# Altium PCB LPC55S69_MINI.PCBdoc (part 1 of 2)
Units mil, origin at the board's own origin, x right, y up, seen from the top; angles counter-clockwise.
Board outline 1610.03 x 1685.03 mil, 2 copper layers (Top Layer, Bottom Layer), stack 31.2 mil thick; 66 components, 51 nets, 267 pads, 110 vias.
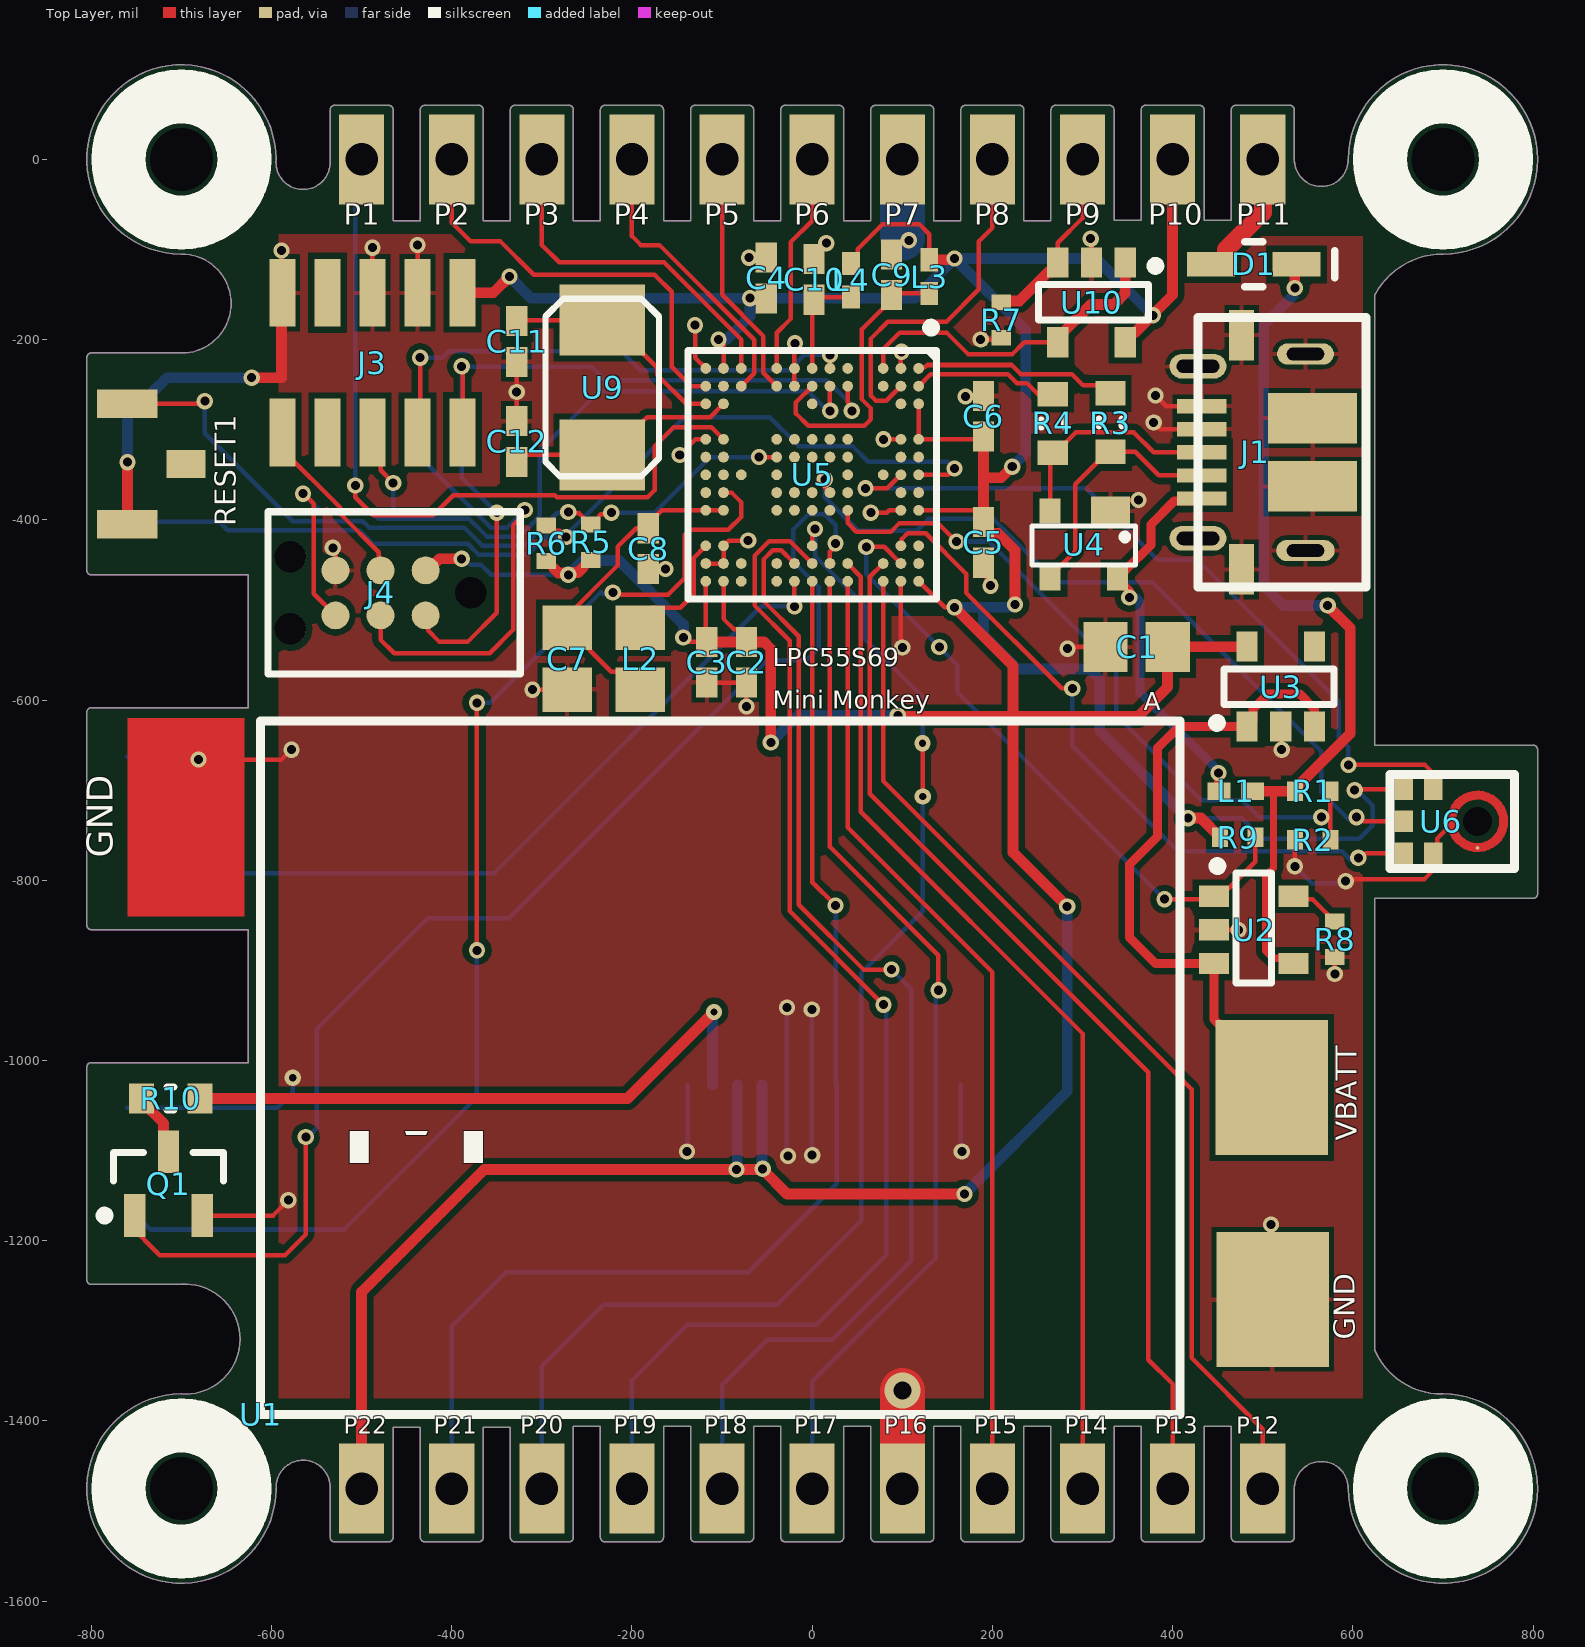
[diagram p0: Top Layer view]
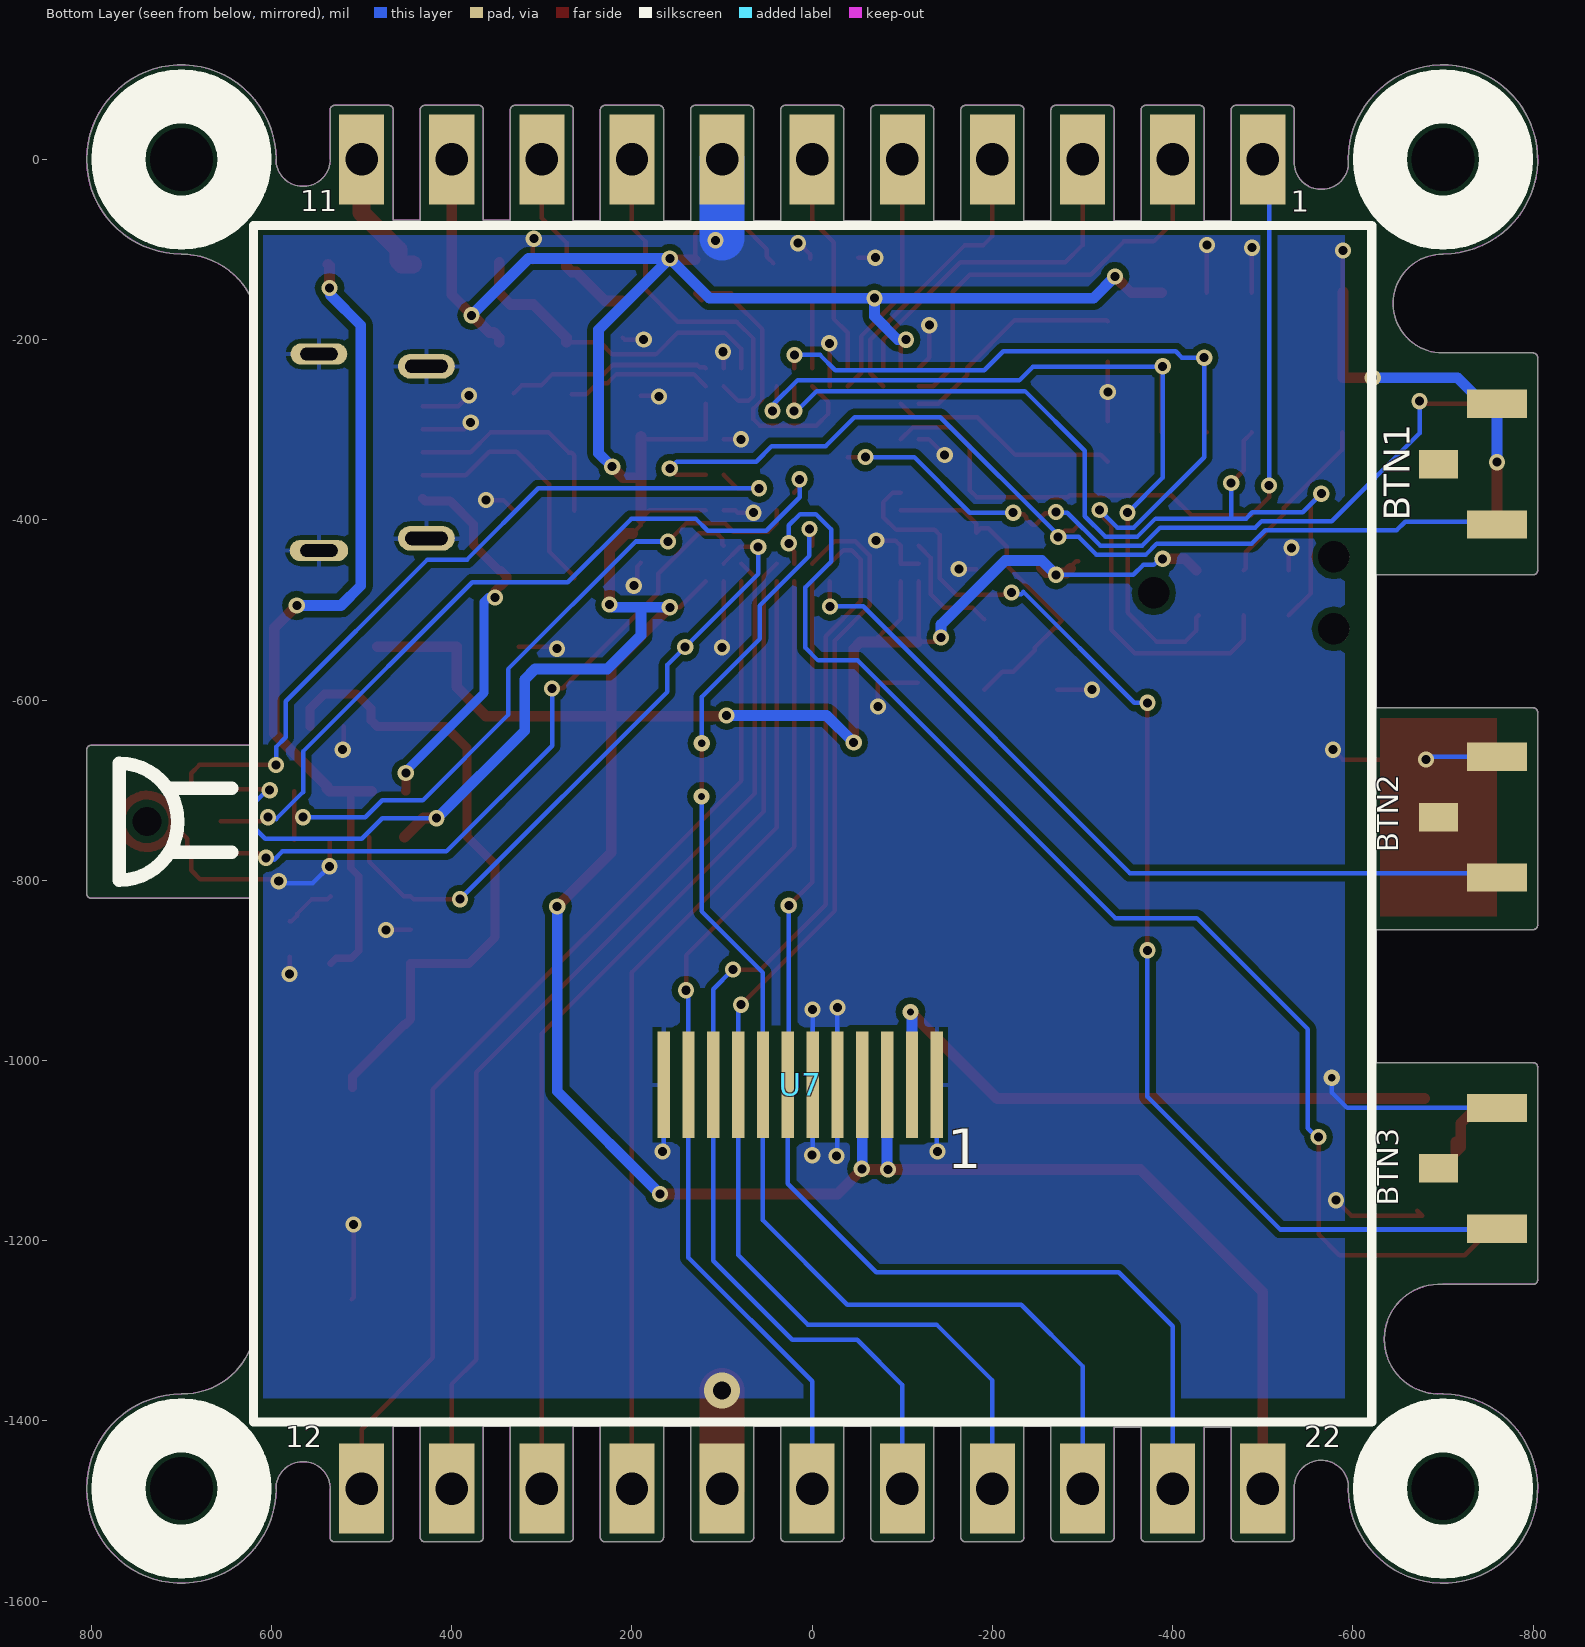
[diagram p1: Bottom Layer view, seen from below]
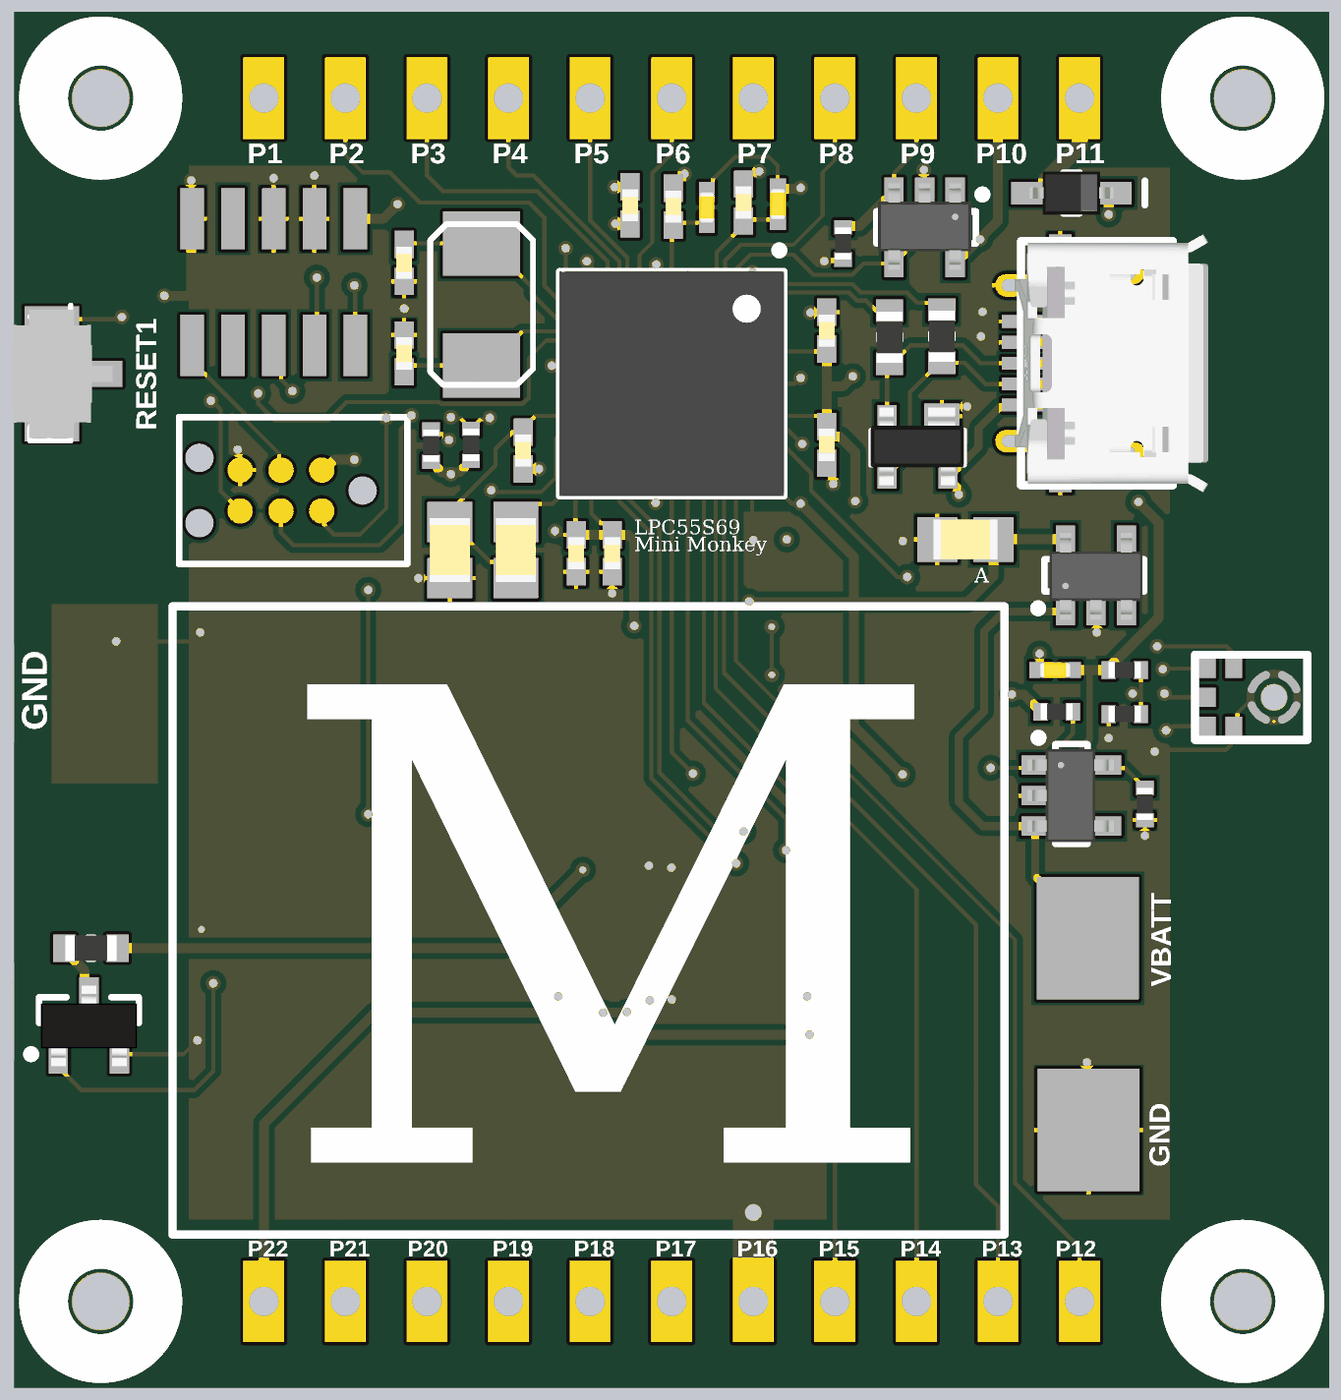
[diagram p2: 3D render of the assembled board from above, using the file's embedded part models]
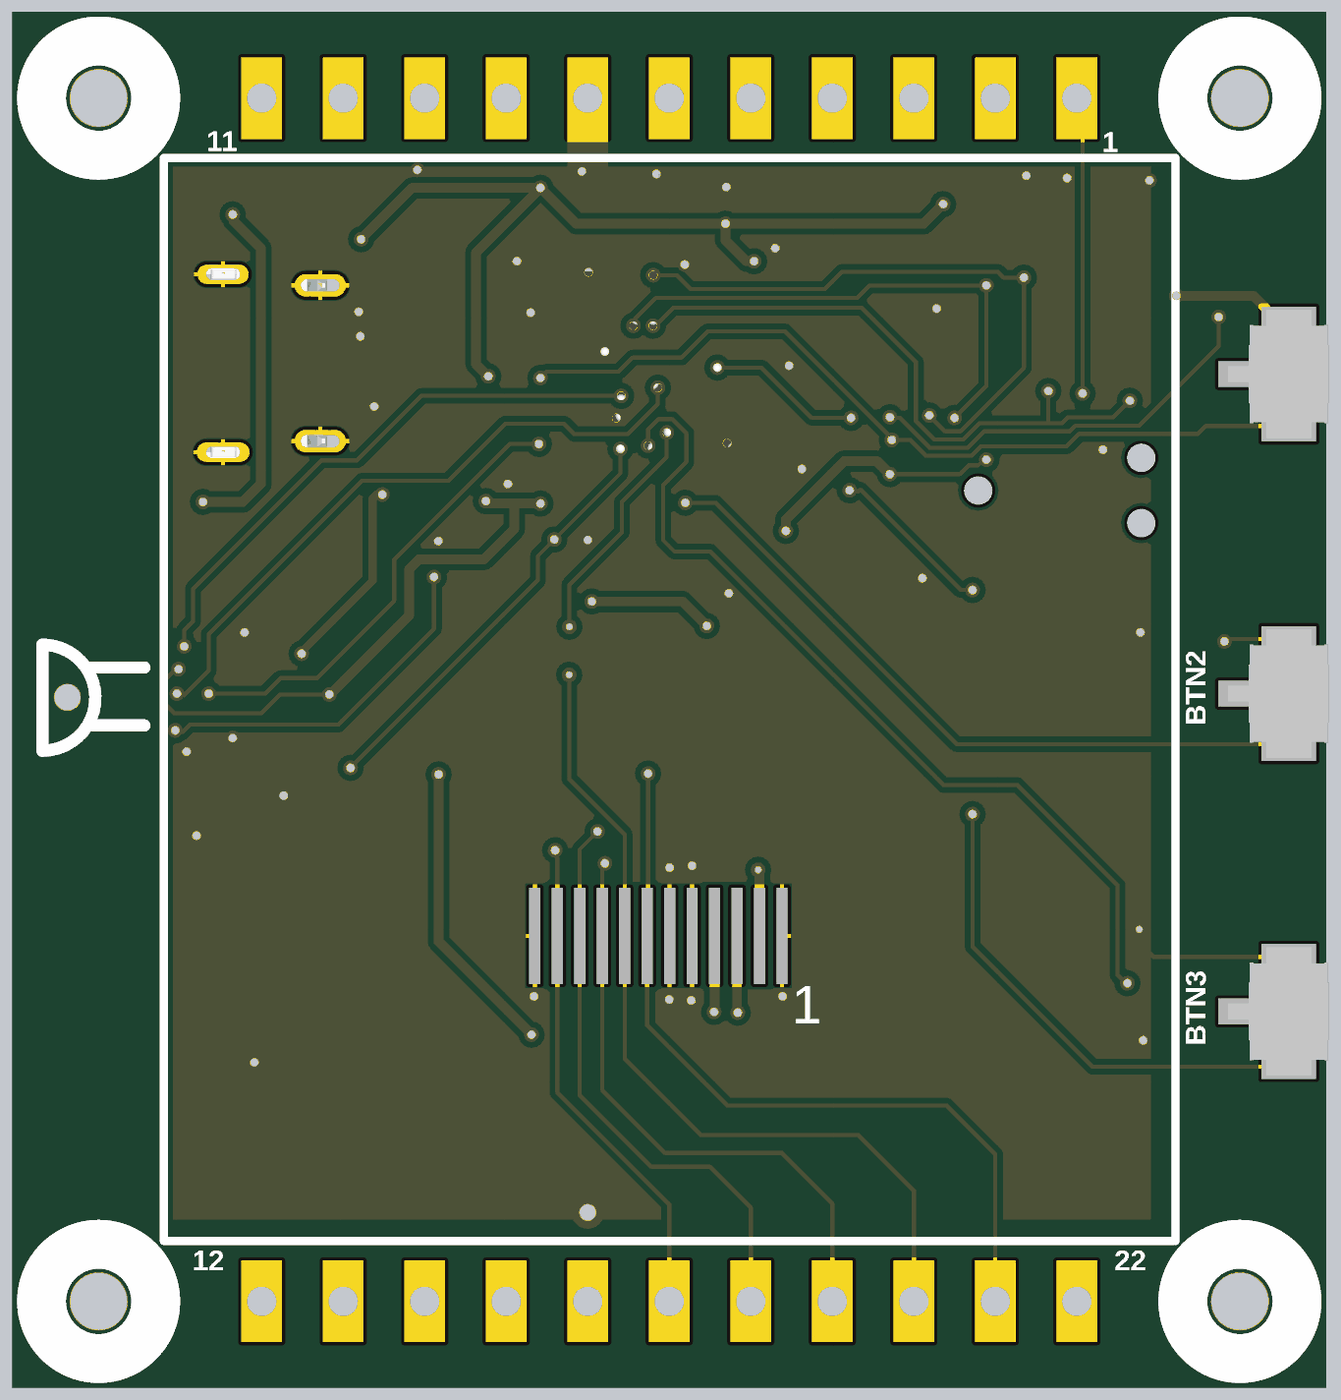
[diagram p3: 3D render of the assembled board from below, using the file's embedded part models]

## Layer stack, top to bottom
Top Solder: solder mask 0.4, Solder Resist, Dk 3.5
Top Layer: signal copper 1.4
Dielectric1: dielectric 28.4, FR-4, Dk 4.8
Bottom Layer: signal copper 1.4
Bottom Solder: solder mask 0.4, Solder Resist, Dk 3.5

## Board outline
-594.98,-1475 ccw(c-600,-1475) -594.99,-1474.8 cw(c-565,-1473.57) -534.99,-1473.57 cw(c-565,-1473.57) -535.01,-1474.8 ccw(c-530,-1475) -535.01,-1475 -535.01,-1529.09 ccw(c-530,-1529.09) -530,-1534.11 -470,-1534.11 ccw(c-470,-1529.09) -464.98,-1529.09 -464.98,-1406.71 -435.01,-1406.71 -435.01,-1529.09 ccw(c-430,-1529.09) -430,-1534.11 -370,-1534.11 ccw(c-370,-1529.09) -364.98,-1529.09 -364.98,-1406.71 -335.01,-1406.71 -335.01,-1529.09 ccw(c-330,-1529.09) -330,-1534.11 -270,-1534.11 ccw(c-270,-1529.09) -264.98,-1529.09 -264.98,-1405.84 -235.01,-1405.84 -235.01,-1529.09 ccw(c-230,-1529.09) -230,-1534.11 -170,-1534.11 ccw(c-170,-1529.09) -164.98,-1529.09 -164.98,-1405.84 -135.01,-1405.84 -135.01,-1529.09 ccw(c-130,-1529.09) -130,-1534.11 -70,-1534.11 ccw(c-70,-1529.09) -64.98,-1529.09 -64.98,-1405.84 -35.01,-1405.84 -35.01,-1529.09 ccw(c-30,-1529.09) -30,-1534.11 30,-1534.11 ccw(c30,-1529.09) 35.02,-1529.09 35.02,-1405.84 64.99,-1405.84 64.99,-1529.09 ccw(c70,-1529.09) 70,-1534.11 130,-1534.11 ccw(c130,-1529.09) 135.02,-1529.09 135.02,-1405.84 164.99,-1405.84 164.99,-1529.09 ccw(c170,-1529.09) 170,-1534.11 230,-1534.11 ccw(c230,-1529.09) 235.02,-1529.09 235.02,-1405.84 264.99,-1405.84 264.99,-1529.09 ccw(c270,-1529.09) 270,-1534.11 330,-1534.11 ccw(c330,-1529.09) 335.02,-1529.09 335.02,-1405.84 364.99,-1405.84 364.99,-1529.09 ccw(c370,-1529.09) 370,-1534.11 430,-1534.11 ccw(c430,-1529.09) 435.02,-1529.09 435.02,-1405.84 464.99,-1405.84 464.99,-1529.09 ccw(c470,-1529.09) 470,-1534.11 530,-1534.11 ccw(c530,-1529.09) 535.02,-1529.09 535.02,-1475 cw(c565,-1475) 594.99,-1475 ccw(c700,-1475) 805.02,-1475 ccw(c700,-1475) 700,-1369.99 ccw(c700,-1375) 699.88,-1369.99 ccw(c698.53,-1289.07) 699.91,-1369.99 699.88,-1369.99 cw(c698.53,-1289.07) 624.23,-1321.15 624.23,-820.01 800,-820.01 ccw(c800,-815) 805.02,-815 805.02,-655 ccw(c800,-655) 800,-649.99 624.23,-649.99 624.23,-150.19 cw(c700.19,-191.46) 699.98,-105.02 cw(c700.19,-191.46) 700.01,-105.01 700,-105.01 ccw(c700,0) 805.02,0 ccw(c700,0) 594.99,0 cw(c565,0) 535.02,0 535.02,55 ccw(c530,55) 530,60.01 470,60.01 ccw(c470,55) 464.99,55 464.99,-67.39 435.02,-67.39 435.02,55 ccw(c430,55) 430,60.01 370,60.01 ccw(c370,55) 364.99,55 364.99,-67.39 335.02,-67.39 335.02,55 ccw(c330,55) 330,60.01 270,60.01 ccw(c270,55) 264.99,55 264.99,-68.25 235.02,-68.25 235.02,55 ccw(c230,55) 230,60.01 170,60.01 ccw(c170,55) 164.99,55 164.99,-68.25 135.02,-68.25 135.02,55 ccw(c130,55) 130,60.01 70,60.01 ccw(c70,55) 64.99,55 64.99,-68.25 35.02,-68.25 35.02,55 ccw(c30,55) 30,60.01 -30,60.01 ccw(c-30,55) -35.01,55 -35.01,-68.25 -64.98,-68.25 -64.98,55 ccw(c-70,55) -70,60.01 -130,60.01 ccw(c-130,55) -135.01,55 -135.01,-68.25 -164.98,-68.25 -164.98,55 ccw(c-170,55) -170,60.01 -230,60.01 ccw(c-230,55) -235.01,55 -235.01,-68.25 -264.98,-68.25 -264.98,55 ccw(c-270,55) -270,60.01 -330,60.01 ccw(c-330,55) -335.01,55 -335.01,-68.25 -364.98,-68.25 -364.98,55 ccw(c-370,55) -370,60.01 -430,60.01 ccw(c-430,55) -435.01,55 -435.01,-68.25 -464.98,-68.25 -464.98,55 ccw(c-470,55) -470,60.01 -530,60.01 ccw(c-530,55) -535.01,55 -535.01,0 ccw(c-530,0) -534.99,-0.49 cw(c-565,-3.21) -534.87,-3.21 cw(c-565,-3.21) -595.01,-0.49 cw(c-565,-3.21) -595.01,-0.46 -595.01,-0.49 ccw(c-600,0) -594.98,0 ccw(c-700,0) -700,-105.01 ccw(c-700,-100) -699.97,-105.01 cw(c-699.69,-159.9) -644.8,-159.9 cw(c-699.69,-159.9) -699.97,-214.79 ccw(c-700,-219.8) -700,-214.79 -800,-214.79 ccw(c-800,-219.8) -805.01,-219.8 -805.01,-456.02 ccw(c-800,-456.02) -800,-461.04 -625.96,-461.04 -625.96,-608.49 -800,-608.49 ccw(c-800,-613.5) -805.01,-613.5 -805.01,-849.72 ccw(c-800,-849.72) -800,-854.74 -625.96,-854.74 -625.96,-1002.19 -800,-1002.19 ccw(c-800,-1007.2) -805.01,-1007.2 -805.01,-1243.43 ccw(c-800,-1243.43) -800,-1248.44 -700,-1248.44 ccw(c-700,-1243.43) -699.68,-1248.43 cw(c-695.79,-1309.21) -634.88,-1309.21 cw(c-695.79,-1309.21) -699.65,-1370 cw(c-695.79,-1309.21) -699.68,-1370 -699.65,-1370 ccw(c-700,-1375) -700,-1369.99 ccw(c-700,-1475)

## Design rules (kind name [scope] priority, off if disabled: settings)
Clearance [All] p1: gap=5 ignorepadtopadclearanceinfootprint=FALSE except(7: Arc-Poly Track-Poly SMDPad-Poly THPad-Poly Via-Poly Fill-Poly Poly-Poly)
PolygonConnect PolygonConnect_1 [IsVia vs InNet('GND')] p1: connectstyle=Direct reliefconductorwidth=10 reliefentries=4 polygonreliefangle="90 Angle" airgapwidth=10
PolygonConnect [All] p2: connectstyle=Relief reliefconductorwidth=5 reliefentries=4 polygonreliefangle="90 Angle" airgapwidth=5
RoutingVias [All] p1: holewidth=12 width=26 viastyle="Through Hole" minholewidth=8 minwidth=18 maxholewidth=50 maxwidth=75
SilkToSolderMaskClearance SilkscreenOverComponentPads [IsPad] p1: minsilkscreentomaskgap=10 clearancetoexposedcopper=TRUE
SolderMaskExpansion [All] p1: expansion=4
Width [All] p1: maxlimit=200 minlimit=5 preferedwidth=5
29 further rules are at their usual default settings.

## Components (designator, comment, footprint, x,y, rotation, side; value= is the part's Value field where it differs from the comment)
BTN1 "B3U-1100P" OMRON_B3U-1100P -760,-338.26 r270 bottom
BTN2 "B3U-1100P" OMRON_B3U-1100P -760,-730 r270 bottom
BTN3 "B3U-1100P" OMRON_B3U-1100P -760,-1119.56 r270 bottom
C1 "10µF" C0805_1.45MM_MD 360,-541 r0 top
C2 "0.1µF" C0402_0.55MM_MD -73,-558 r90 top
C3 "47pF" C0402_0.55MM_MD -117,-558 r90 top
C4 "0.1µF" C0402_0.55MM_MD -51,-131.5 r270 top
C5 "0.1µF" C0402_0.55MM_MD 190,-425 r90 top
C6 "0.1µF" C0402_0.55MM_MD 190,-285 r270 top
C7 "10µF" C0805_1.45MM_MD -272,-554 r90 top
C8 "0.1µF" C0402_0.55MM_MD -182,-432 r90 top
C9 "0.1µF" C0402_0.55MM_MD 88,-128 r90 top
C10 "0.1µF" C0402_0.55MM_MD 2,-133 r270 top
C11 "18pF" C0402_0.55MM_MD -328,-202 r90 top
C12 "18pF" C0402_0.55MM_MD -328,-313 r270 top
D1 "BAT760-7" D_SOD-323_P 490,-116.36 r0 top
J1 "USB Micro B" 10103594-0001LF 491.69,-325 r180 top
J3 "FTSH-105-01-F-DV" "FTSH-105-04-F-DV - HD - NO_STEP" -488,-225 r180 top
J4 "TC2030‐CTL‐NL" "TC2030 NO LATCH" -479,-481 r180 top value=TC2030-CTL-NL
L1 "BKP1005EM221-T" C0402_HD 470,-701.13 r0 top
L2 "CBC2012T4R7M" C0805_1.45MM_MD -191,-554 r90 top
L3 "BKP1005EM221-T" C0402_HD 130,-130 r270 top
L4 "BKP1005EM221-T" C0402_HD 43,-134 r270 top
P1 "" CASTELLATED -500,0 r0 top
P2 "" CASTELLATED -400,0 r180 top
P3 "" CASTELLATED -300,0 r180 top
P4 "" CASTELLATED -200,0 r180 top
P5 "" CASTELLATED -100,0 r180 top
P6 "" CASTELLATED 0,0 r180 top
P7 "" CASTELLATED 100,0 r180 top
P8 "" CASTELLATED 200,0 r180 top
P9 "" CASTELLATED 300,0 r180 top
P10 "" CASTELLATED 400,0 r180 top
P11 "" CASTELLATED 500,0 r180 top
P12 "" CASTELLATED 500,-1475 r180 top
P13 "" CASTELLATED 400,-1475 r0 top
P14 "" CASTELLATED 300,-1475 r0 top
P15 "" CASTELLATED 200,-1475 r0 top
P16 "" CASTELLATED 100,-1475 r0 top
P17 "" CASTELLATED 0,-1475 r0 top
P18 "" CASTELLATED -100,-1475 r0 top
P19 "" CASTELLATED -200,-1475 r0 top
P20 "" CASTELLATED -300,-1475 r0 top
P21 "" CASTELLATED -400,-1475 r0 top
P22 "" CASTELLATED -500,-1475 r0 top
Q1 "FDV303N" SOT-23 -714.4,-1136.57 r90 top
R1 "10k" R0402_0.40MM_MD 555.27,-701.13 r0 top
R2 "19.1k" R0402_0.40MM_MD 555.27,-755 r0 top
R3 "33" R0603_0.55MM_MD 331,-292 r90 top
R4 "33" R0603_0.55MM_MD 267,-293 r90 top
R5 "10k" R0402_0.40MM_MD -246,-425 r270 top
R6 "10k" R0402_0.40MM_MD -295,-426 r270 top
R7 "10k" R0402_0.40MM_MD 210,-178.2 r90 top
R8 "10k" R0402_0.40MM_MD 580,-865.32 r90 top
R9 "10k" R0402_0.40MM_MD 472,-752 r0 top
R10 "10" R0603_0.55MM_MD -712,-1042 r0 top
RESET1 "B3U-1100P" OMRON_B3U-1100P -760,-338 r90 top
U1 "1317" LIPO-150MAH -612,-1393 r0 top
U2 "MCP73832T-2ATI/OT" SOT23-5 490,-855 r0 top
U3 "MCP1802T-3302I/OT" SOT23-5 520,-585 r90 top
U4 "PRTR5V0U2X,215" SOT143B 331,-390 r180 top
U5 "LPC55S69JEV98K" 98-VFBGA 0,-350 r270 top
U6 "SPH0645LM4H-B" SPH0645LM4H-B 738.29,-734.57 r90 top
U7 "ER-TFT1.54-1" ER-TFT1.54-1 13.31,-1026.89 r180 bottom locked
U9 "16MHz" ABM3 -233,-253 r90 top
U10 "IC SINGLE SUPPLY OPAMP SOT-23-5" SOT95P245X145-5L 310,-158.51 r270 top value=OPA340NA

## Footprints (in the part's own frame and the unit in brackets; to place one, negate y for a bottom-side part, rotate by r counter-clockwise, add the part's x,y. Pads: shape width x height; smd on the part's side, far side on the other; paste and mask are expansions set on the pad)
98-VFBGA [mil] "BGA, 98-Leads, Body 7.00x7.00mmx0.97mm, Pitch 0.50mm"
  round 12 smd paste+0 mask+1: A1(-118.11,118.11) A2(-98.43,118.11) A3(-78.74,118.11) A5(-39.37,118.11) A6(-19.68,118.11) A7(0,118.11) A8(19.69,118.11) A9(39.37,118.11) A11(78.74,118.11) A12(98.43,118.11) A13(118.11,118.11) B1(-118.11,98.43) B2(-98.43,98.43) B3(-78.74,98.43) B5(-39.37,98.43) B6(-19.68,98.43) B7(0,98.43) B8(19.69,98.43) B9(39.37,98.43) B11(78.74,98.43) B12(98.43,98.43) B13(118.11,98.43) C1(-118.11,78.74) C2(-98.43,78.74) C7(0,78.74) C12(98.43,78.74) C13(118.11,78.74) E1(-118.11,39.37) E2(-98.43,39.37) E5(-39.37,39.37) E6(-19.68,39.37) E7(0,39.37) E8(19.69,39.37) E9(39.37,39.37) E12(98.43,39.37) E13(118.11,39.37) F1(-118.11,19.69) F2(-98.43,19.69) F5(-39.37,19.69) F6(-19.68,19.69) F8(19.69,19.69) F9(39.37,19.69) F12(98.43,19.69) F13(118.11,19.69) G1(-118.11,0) G2(-98.43,0) G3(-78.74,0) G5(-39.37,0) G6(-19.68,0) G8(19.69,0) G9(39.37,0) G11(78.74,0) G12(98.43,0) G13(118.11,0) H1(-118.11,-19.69) H2(-98.43,-19.69) H5(-39.37,-19.69) H6(-19.68,-19.69) H8(19.69,-19.69) H9(39.37,-19.69) H12(98.43,-19.69) H13(118.11,-19.69) J1(-118.11,-39.37) J2(-98.43,-39.37) J5(-39.37,-39.37) J6(-19.68,-39.37) J7(0,-39.37) J8(19.69,-39.37) J9(39.37,-39.37) J12(98.43,-39.37) J13(118.11,-39.37) L1(-118.11,-78.74) L2(-98.43,-78.74) L7(0,-78.74) L12(98.43,-78.74) L13(118.11,-78.74) M1(-118.11,-98.43) M2(-98.43,-98.43) M3(-78.74,-98.43) M5(-39.37,-98.43) M6(-19.68,-98.43) M7(0,-98.43) M8(19.69,-98.43) M9(39.37,-98.43) M11(78.74,-98.43) M12(98.43,-98.43) M13(118.11,-98.43) N1(-118.11,-118.11) N2(-98.43,-118.11) N3(-78.74,-118.11) N5(-39.37,-118.11) N6(-19.68,-118.11) N7(0,-118.11) N8(19.69,-118.11) N9(39.37,-118.11) N11(78.74,-118.11) N12(98.43,-118.11) N13(118.11,-118.11)
  silkscreen extent -168,-138 138,138, body extent -138,-138 138,138, height 38
10103594-0001LF [mm] "USB uB"
  rect 1.4x0.4 smd: 1(1.506,1.3) 2(1.506,0.65) 3(1.506,0) 4(1.506,-0.65) 5(1.506,-1.3)
  rect 2.5x1.425 smd: MOUNT(-1.615,0.962) MOUNT(-1.615,-0.962)
  oval 1.65x0.6 hole 0.36 slot 1.05 at 0 deg: MOUNT(-1.415,2.77)
  oval 1.6x0.6 hole 0.36 slot 1.05 at 0 deg: MOUNT(-1.415,-2.77)
  rect 0.7x1.425 smd: MOUNT(0.385,3.3) MOUNT(0.385,-3.3)
  oval 1.6x0.7 hole 0.38 slot 1.2 at 0 deg: MOUNT(1.615,2.425) MOUNT(1.615,-2.425)
  silkscreen extent -3.11,-3.8 1.62,3.8, body extent -4.21,-4.02 1.82,4.02, height 2.89
ABM3 [mm] "Abracon Crystal 5x3.2mm"
  rect 2x2.4 smd: 1(-1.9,0) 2(1.9,0)
  silkscreen extent -2.5,-1.6 2.5,1.6, body extent -2.5,-1.6 2.5,1.6, height 1.3
C0402_0.55MM_MD [mm] "Capacitor - 0402 - Medium Density"
  rect 0.85x0.6 smd: 1(-0.575,0) 2(0.575,0)
  body extent -0.5,-0.25 0.5,0.25, height 0.55
C0402_HD [mm] "Capacitor 0402 - High Density"
  rect 0.65x0.5 smd: 1(-0.475,0) 2(0.475,0)
  body extent -0.5,-0.25 0.5,0.25, height 0.55
C0805_1.45MM_MD [mm] "Capacitor - 0805 - Medium Density"
  rect 1.25x1.4 smd: 1(-0.875,0) 2(0.875,0)
  body extent -1,-0.62 1,0.63, height 1.45
CASTELLATED [mil]
  rect 50x100 hole 36: 1(0,0)
D_SOD-323_P [mm] "SOD-123 Diode - Polarized"
  rect 1.35x0.7 smd: 1(-1.2,0) 2(1.2,0)
  silkscreen extent -0.25,-0.64 2.29,0.64, body extent -1.3,-0.68 1.3,0.67, height 1.1
ER-TFT1.54-1 [mm]
  rect 0.35x3 smd: 1(3.85,0) 2(3.15,0) 3(2.45,0) 4(1.75,0) 5(1.05,0) 6(0.35,0) 7(-0.35,0) 8(-1.05,0) 9(-1.75,0) 10(-2.45,0) 11(-3.15,0) 12(-3.85,0)
  silkscreen extent -15.41,-9.5 16.11,24.22, body extent -15.54,-9.63 16.24,24.35, height 2.1
"FTSH-105-04-F-DV - HD - NO_STEP" [mil] "Connector for Cortex Serial Wire Debug"
  rect 29x75 smd: 1(-100,-77) 2(-100,78) 3(-50,-77) 4(-50,78) 5(0,-77) 6(0,78) 7(50,-77) 8(50,78) 9(100,-77) 10(100,78)
LIPO-150MAH [mil]
  silkscreen extent 0,0 1020,770, body extent 0,0 1020,770, height 140
OMRON_B3U-1100P [mm] "Omron Ultra-small tactile switch B3U 3.0 x 2.5 x 1.2mm"
  rect 0.8x1.7 smd: 1(-1.7,0) 2(1.7,0)
  rect 0.8x1.1 smd: S(0,-1.65)
  body extent -2,-1.9 2,1.25, height 1.61
R0402_0.40MM_MD [mm] "Resistor 0402 Medium Density"
  rect 0.45x0.55 smd: 1(-0.5,0) 2(0.5,0)
  body extent -0.5,-0.25 0.5,0.25, height 0.4
R0603_0.55MM_MD [mm] "Resistor 0603 Medium Density"
  rect 0.7x0.85 smd: 1(-0.825,0) 2(0.825,0)
  silkscreen extent -0.1,-0.33 0.1,0.33, body extent -0.8,-0.4 0.8,0.4, height 0.55
SOT23-5 [mm] "SOT23, 5-Leads, Body 3.1x2.6mm (max), Pitch 0.95mm, IPC High Density"
  rect 0.85x0.6 smd: 1(-1.125,0.95) 2(-1.125,0) 3(-1.125,-0.95) 4(1.125,-0.95) 5(1.125,0.95)
  silkscreen extent -1.15,-1.5 0.5,1.92, body extent -1.38,-1.45 1.32,1.45, height 1.15
SOT95P245X145-5L [mm] "SOT23, 5-Leads, Body 3.1x2.6mm (max), Pitch 0.95mm, IPC High Density"
  rect 0.85x0.6 smd: 1(-1.125,0.95) 2(-1.125,0) 3(-1.125,-0.95) 4(1.125,-0.95) 5(1.125,0.95)
  silkscreen extent -1.15,-1.5 0.5,1.93, body extent -1.38,-1.45 1.32,1.45, height 1.15
SOT143B [mm] "SOT143B"
  rect 1.1x0.8 smd: 1(0,0)
  rect 0.6x0.7 smd: 2(1.702,0) 3(1.702,1.9) 4(-0.2,1.9)
  silkscreen extent -0.71,0.43 2.21,1.52, body extent -0.7,-0.27 2.22,2.15, height 1
SOT-23 [mm] "SOT-23"
  rect 1.2x0.6 smd: 1(-0.9,0.95) 2(-0.9,-0.95) 3(0.9,0)
  silkscreen extent -1.02,-1.55 0.87,1.92, body extent -1.27,-1.5 1.23,1.5, height 1.07
SPH0645LM4H-B [mm]
  rect 0.6x0.522 smd: 1(-0.9,2.074) 2(-0.9,1.252) 4(0.9,1.252) 5(0.9,2.074) 6(0,2.074)
  round 0.1 smd paste-100 mask+0: 3(-0.75,0)
  round 0 hole 0.813 paste-25.4: PORT_HOLE(0,0)
  Top Layer lines w0.254: -0.083,0.734 cw(c0,0) 0,-0.738 cw(c0,0) -0.083,0.734
  silkscreen extent -1.33,-1.04 1.33,2.46, body extent -1.33,-1.02 1.33,2.45, height 1
"TC2030 NO LATCH" [mil] "TC2030  NO LATCH"
  round 31 smd paste-40: 1(-50,-25) 2(-50,25) 3(0,-25) 4(0,25) 5(50,-25) 6(50,25)
  round 34 hole 35 unplated: A(-100,0) B(100,40) C(100,-40)
  silkscreen extent -155,-90 125,90

## Part data
BTN1 BTN2 BTN3 RESET1: "SWITCH TACTILE SPST-NO 0.05A 12V", Contact Rating @ Voltage="0.05A @ 12VDC", Illumination Type, Color=-, Manufacturer="Omron Electronics Inc-EMC Div", Operating Force=153gf, Operating Temperature="-25°C ~ 70°C", Supplier Part Number 1=SW1021CT-ND, Actuator Height off PCB, from Pins=1.60mm, Actuator Material=-, Actuator Orientation="Top Actuated", Actuator Type=Standard, Category=Switches, CategorySort=700, Circuit=SPST-NO, ComponentLink1Description=http://www.components.omron.com/components/web/PDFLIB.nsf/0/2DD3893C7DD33E9E862572900079E9D6/$file/B3U_1110.pdf, ComponentLink1URL=http://www.components.omron.com/components/web/PDFLIB.nsf/0/2DD3893C7DD33E9E862572900079E9D6/$file/B3U_1110.pdf, Features="Grounding Pin", Illumination=Non-Illuminated, Illumination Voltage (Nominal)=-, Ingress Protection="Dust Proof", Manufacturer Part Number=B3U-1100P, Mechanical Life="200,000 Cycles", Mounting Type="Surface Mount", Outline="3.00mm x 2.50mm", Packaging="Cut Tape (CT)", Pricing 1="1=1.25, 10=1.201, 25=1.1332, 50=0.997, 100=0.9064, 250=0.86108, 500=0.83842, 1000=0.65714 (USD)", RoHS="RoHS Compliant", Stock 1=45170, Supplier 1=Digi-Key, Switch Function=Off-Mom, Switch Travel=0.15mm, Termination Style="SMD (SMT) Tab"
C1 C7: library part CGA4J1X7R0J106K125AC, "CAP CER 10UF 6.3V X7R 0805", Manufacturer="TDK Corporation", Operating Temperature="-55°C ~ 125°C", Package=0805, Ratings=AEC-Q200, Supplier Part Number 1=445-6971-1-ND, Temperature Coefficient=X7R, Tolerance=±10%, Voltage - Rated=6.3V, Category=Capacitors, ComponentLink1Description="Datasheet (Internal)", ComponentLink1URL=datasheets\TDK\mlcc_automotive_general_en.pdf, ComponentLink2Description="Datasheet (External)", ComponentLink2URL=https://product.tdk.com/info/en/catalog/datasheets/mlcc_automotive_general_en.pdf, Features=-, Manufacturer Part Number=CGA4J1X7R0J106K125AC, Substitution Notes="10µF , 6.3V , ±10% , X7R , -55°C ~ 125°C , AEC-Q200 , 0805", Supplier 1=Digikey, Thickness (Max)=1.45MM
C2 C4 C5 C6 C8 C9 C10: library part CGA2B1X7R1C104K050BC, "CAP CER 0.1UF 16V X7R 0402", Manufacturer="TDK Corporation", Operating Temperature="-55°C ~ 125°C", Package=0402, Ratings=AEC-Q200, Supplier Part Number 1=445-5613-1-ND, Temperature Coefficient=X7R, Tolerance=±10%, Voltage - Rated=16V, Category=Capacitors, ComponentLink1Description="Datasheet (Internal)", ComponentLink1URL=datasheets\TDK\mlcc_automotive_general_en.pdf, ComponentLink2Description="Datasheet (External)", ComponentLink2URL=https://product.tdk.com/info/en/catalog/datasheets/mlcc_automotive_general_en.pdf, Features=-, Manufacturer Part Number=CGA2B1X7R1C104K050BC, Substitution Notes="0.1µF , 16V , ±10% , X7R , -55°C ~ 125°C , AEC-Q200 , 0402", Supplier 1=Digikey, Thickness (Max)=0.55MM
C3: library part CGA2B2C0G1H470J050BA, "CAP CER 47PF 50V C0G 0402", Manufacturer="TDK Corporation", Operating Temperature="-55°C ~ 125°C", Package=0402, Ratings=AEC-Q200, Supplier Part Number 1=445-5592-1-ND, Temperature Coefficient="C0G, NP0", Tolerance=±5%, Voltage - Rated=50V, Category=Capacitors, ComponentLink1Description="Datasheet (Internal)", ComponentLink1URL=datasheets\TDK\mlcc_automotive_general_en.pdf, ComponentLink2Description="Datasheet (External)", ComponentLink2URL=https://product.tdk.com/info/en/catalog/datasheets/mlcc_automotive_general_en.pdf, Features=-, Manufacturer Part Number=CGA2B2C0G1H470J050BA, Substitution Notes="47pF , 50V , ±5% , C0G, NP0 , -55°C ~ 125°C , AEC-Q200 , 0402", Supplier 1=Digikey, Thickness (Max)=0.55MM
C11 C12: library part CGA2B2C0G1H180J050BA, "CAP CER 18PF 50V C0G 0402", Manufacturer="TDK Corporation", Operating Temperature="-55°C ~ 125°C", Package=0402, Ratings=AEC-Q200, Supplier Part Number 1=445-5587-1-ND, Temperature Coefficient="C0G, NP0", Tolerance=±5%, Voltage - Rated=50V, Category=Capacitors, ComponentLink1Description="Datasheet (Internal)", ComponentLink1URL=datasheets\TDK\mlcc_automotive_general_en.pdf, ComponentLink2Description="Datasheet (External)", ComponentLink2URL=https://product.tdk.com/info/en/catalog/datasheets/mlcc_automotive_general_en.pdf, Features=-, Manufacturer Part Number=CGA2B2C0G1H180J050BA, Substitution Notes="18pF , 50V , ±5% , C0G, NP0 , -55°C ~ 125°C , AEC-Q200 , 0402", Supplier 1=Digikey, Thickness (Max)=0.55MM
D1: "DIODE SCHOTTKY 30V 1A SOD323", Capacitance @ Vr- F="25pF @ 5V- 1MHz", Current - Average Rectified (Io)=1A, Current - Reverse Leakage @ Vr="50µA @ 15V", Manufacturer="Diodes Inc", Package="SC-76- SOD-323", Supplier Device Package=SOD-323, Supplier Part Number 1=BAT760DICT-ND, Voltage - DC Reverse (Vr) (Max)=30V, Voltage - Forward (Vf) (Max) @ If="550mV @ 1A", Category=Diodes, CategorySort=400, ComponentLink1Description="Internal Datasheet", ComponentLink1URL=http://www.diodes.com/datasheets/ds30498.pdf, ComponentLink2Description="External Datasheet", ComponentLink2URL=http://www.diodes.com/datasheets/ds30498.pdf, Diode Suffix=1A_2C, Diode Type=Schottky, Manufacturer Part Number=BAT760-7, Mounting Type="Surface Mount", Num Pins=2, Packaging="Cut Tape (CT)", Reverse Recovery Time (trr)=-, SortValue=BAT760-7, Speed="Fast Recovery =< 500ns- > 200mA (Io)", Supplier 1=Digi-Key
J1: library part 10103594-0001LF, "CONN RCPT STD MICRO USB TYPE B", Manufacturer=FCI, Supplier Part Number 1=609-4050-1-ND, Category="Connectors, Interconnects", ComponentLink1Description=http://portal.fciconnect.com/res/en/pdffiles/doc_search/10103594.pdf, ComponentLink1URL=http://portal.fciconnect.com/res/en/pdffiles/doc_search/10103594.pdf, Connector Type="USB - micro B", Features="Shielded, Solder Retention", Gender=Receptacle, Ingress Protection=-, Manufacturer Part Number=10103594-0001LF, Micro USB B=Value, Mounting Type="Surface Mount, Right Angle, Horizontal", Notes="Similar to", Number of Contacts=5, Packaging="Cut Tape (CT)", Pricing 1="1=1.1, 10=0.768, 100=0.517, 250=0.43912, 500=0.41716 (USD)", RoHS="RoHS Compliant", Specifications="USB 2.0", Stock 1=23288, Supplier 1=Digi-Key
J3: library part CORTEX-DEBUG, "SAMTEC - FTSH-105-01-F-DV - .050 X .050", Manufacturer=SAMTEC, Supplier Part Number 1=01R3399, Category=Connectors, Manufacturer Part Number=FTSH-105-01-F-DV, Pricing 1="1=0.974, 25000=0.835, 50000=0.774 (USD)", Stock 1=0, Supplier 1=Newark
J4: library part TC2030-CTL-NL, "Tag Connect Pads - No latching Clips - ARM"
L1 L3 L4: "FERRITE BEAD 220 OHM 0402 1LN", Current Rating (Max)=1A, DC Resistance (DCR) (Max)="150 mOhm", Impedance @ Frequency="220 Ohm @ 100MHz", Manufacturer="Taiyo Yuden", Operating Temperature="-55°C ~ 85°C", Package / Case="0402 (1005 Metric)", Ratings=-, Supplier Part Number 1=587-3290-2-ND, Category=Filters, ComponentLink1Description=http://ds.yuden.co.jp/TYCOMPAS/ut/detail.do?productNo=BKP1005EM221-T&fileName=BKP1005EM221-T_SS&mode=specSheetDownload, ComponentLink1URL=http://ds.yuden.co.jp/TYCOMPAS/ut/detail.do?productNo=BKP1005EM221-T&fileName=BKP1005EM221-T_SS&mode=specSheetDownload, Filter Type="Power Line", Height (Max)="0.022\" (0.55mm)", Manufacturer Part Number=BKP1005EM221-T, Mounting Type="Surface Mount", Number of Lines=1, Packaging="Tape & Reel (TR)", Pricing 1="10000=0.0145, 20000=0.014, 30000=0.013, 50000=0.01285 (USD)", RoHS="RoHS Compliant", Size / Dimension="0.039\" L x 0.022\" W (1.00mm x 0.55mm)", Stock 1=60000, Supplier 1=Digi-Key
L2: "FIXED IND 4.7UH 520MA 650 MOHM", Case/Package=0805, Case Code (Metric)=2012, Current Rating=520mA, DC Resistance (DCR)=650mR, Inductance=4.7uH, Inductance Tolerance=20%, Manufacturer="Taiyo Yuden", Max Operating Temperature=105°C, Min Operating Temperature=-40°C, Package Quantity=3000, Saturation Current=360mA, Self Resonant Frequency=45MHz, Supplier Part Number 1=587-1602-1-ND, Test Frequency=7.96MHz, Case Code (Imperial)=0805, ComponentLink1Description=https://datasheet.ciiva.com/15981/214cbc2012t4r7m-15981637.pdf?src-supplier=Onlinecomponents.com, ComponentLink1URL=https://datasheet.ciiva.com/15981/214cbc2012t4r7m-15981637.pdf?src-supplier=Onlinecomponents.com, ComponentLink2Description=https://datasheet.ciiva.com/1040/cbc2012t4r7m-ss-1040456.pdf?src-supplier=Digi-Key, ComponentLink2URL=https://datasheet.ciiva.com/1040/cbc2012t4r7m-ss-1040456.pdf?src-supplier=Digi-Key, ComponentLink3Description=https://datasheet.ciiva.com/8505/cbc2012t4r7m-ss-8505656.pdf?src-supplier=Avnet, ComponentLink3URL=https://datasheet.ciiva.com/8505/cbc2012t4r7m-ss-8505656.pdf?src-supplier=Avnet, ComponentLink4Description=https://datasheet.ciiva.com/8001/wound02-e-8001849.pdf?src-supplier=Element14, ComponentLink4URL=https://datasheet.ciiva.com/8001/wound02-e-8001849.pdf?src-supplier=Element14, Composition=Wirewound, Core Material=Ferrite, Halogen Free="Halogen Free", Height=1.25mm, Height - Seated (Max)=0.057inch, Lead Free=Exempt, Length=0.079inch, Manufacturer Part Number=CBC2012T4R7M, Max DC Current=520mA, Mount="Surface Mount", Number of Pins=2, Packaging="Tape and Reel", Pricing 1="1=0.24000, 10=0.21600, 100=0.14860, 500=0.12702, 1000=0.09729 (USD)", REACH SVHC="No SVHC", RoHS=Yes, Shielding=Unshielded, Stock 1=7720, Supplier 1=Digi-Key, Termination=SMD/SMT, Tolerance=20%, Width=0.049inch
Q1: "MOSFET N-CH 25V 680MA SOT-23", Current - Continuous Drain (Id) @ 25° C=680mA, Drain to Source Voltage (Vdss)=25V, Input Capacitance (Ciss) @ Vds="50pF @ 10V", Manufacturer="Fairchild Semiconductor", Package / Case="SOT-23-3, TO-236-3, Micro3™, SSD3, SST3", Power - Max=350mW, Source Part Number=FDV303NCT-ND, Supplier Device Package=SOT-23, Category="Discrete Semiconductor Products", ComponentLink1Description=http://www.fairchildsemi.com/ds/FD/FDV303N.pdf, ComponentLink1URL=http://www.fairchildsemi.com/ds/FD/FDV303N.pdf, FET Feature="Logic Level Gate", FET Type="MOSFET N-Channel, Metal Oxide", Gate Charge (Qg) @ Vgs="2.3nC @ 4.5V", Manufacturer Part Number=FDV303N, Mounting Type="Surface Mount", Packaging="Cut Tape (CT)", Pricing 1="1=0.49, 10=0.347, 100=0.231, 250=0.16632, 500=0.13398, 750=0.11551, 1000=0.10395, 2000=0.0924 (USD)", Rds On (Max) @ Id, Vgs="450 mOhm @ 500mA, 4.5V", RoHS="RoHS Compliant", Source=Digikey, Stock 1=0, Supplier 1=Digi-Key, Supplier Part Number 1=FDV303NCT-ND, Vgs(th) (Max) @ Id="1.5V @ 250µA"
R1 R5 R6 R7 R8 R9: library part ERJ-2RKF1002X, "RES 10K OHM 1/10W 1% 0402 SMD", Limiting Element Voltage=50, Manufacturer="Panasonic Electronic Components", Maximum Overload Voltage=100, Maximum Working Voltage=31.6V, Package="0402 (1005 Metric)", Package Power="0402  (0.1W)", Power (Watts)="0.1W- 1/10W", Ratings=AEC-Q200, Sort Value=10000, Sort Value Package=402_10000, Supplier Package=0402, Supplier Part Number 1=P10.0KLCT-ND, Temperature Coefficient=±100ppm/°C, Tolerance=±1%, Category=Resistors, ComponentLink1Description="Internal Datasheet", ComponentLink1URL="datasheets\Panasonic Electronic Components\AOA0000CE2.pdf", ComponentLink2Description="External Datasheet", ComponentLink2URL=http://industrial.panasonic.com/www-data/pdf/AOA0000/AOA0000CE2.pdf, Composition="Thick Film", Features=-, Height=0.40MM, Manufacturer Part Number=ERJ-2RKF1002X, Number of Terminations=2, Packaging="Cut Tape (CT)", Resistance (Ohms)=10k, Size / Dimension="0.039\" L x 0.020\" W (1.00mm x 0.50mm)", Substitution Notes="10k , ±1% , 0402 , AEC-Q200", Supplier 1=Digi-Key
R2: library part ERJ-2RKF1912X, "RES 19.1K OHM 1/10W 1% 0402 SMD", Limiting Element Voltage=50, Manufacturer="Panasonic Electronic Components", Maximum Overload Voltage=100, Maximum Working Voltage=43.7V, Package="0402 (1005 Metric)", Package Power="0402  (0.1W)", Power (Watts)="0.1W- 1/10W", Ratings=AEC-Q200, Sort Value=19100, Sort Value Package=402_19100, Supplier Package=0402, Supplier Part Number 1=P19.1KLCT-ND, Temperature Coefficient=±100ppm/°C, Tolerance=±1%, Category=Resistors, ComponentLink1Description="Internal Datasheet", ComponentLink1URL="datasheets\Panasonic Electronic Components\AOA0000CE2.pdf", ComponentLink2Description="External Datasheet", ComponentLink2URL=http://industrial.panasonic.com/www-data/pdf/AOA0000/AOA0000CE2.pdf, Composition="Thick Film", Features=-, Height=0.40MM, Manufacturer Part Number=ERJ-2RKF1912X, Number of Terminations=2, Packaging="Cut Tape (CT)", Resistance (Ohms)=19.1k, Size / Dimension="0.039\" L x 0.020\" W (1.00mm x 0.50mm)", Substitution Notes="19.1k , ±1% , 0402 , AEC-Q200", Supplier 1=Digi-Key
R3 R4: library part ERJ-3EKF33R0V, "RES 33 OHM 1/10W 1% 0603 SMD", Limiting Element Voltage=75, Manufacturer="Panasonic Electronic Components", Maximum Overload Voltage=150, Maximum Working Voltage=1.8V, Package="0603 (1608 Metric)", Package Power="0603  (0.1W)", Power (Watts)="0.1W- 1/10W", Ratings=AEC-Q200, Sort Value Package=603_33, Supplier Package=0603, Supplier Part Number 1=P33.0HCT-ND, Temperature Coefficient=±100ppm/°C, Tolerance=±1%, Category=Resistors, ComponentLink1Description="Internal Datasheet", ComponentLink1URL="datasheets\Panasonic Electronic Components\AOA0000CE2.pdf", ComponentLink2Description="External Datasheet", ComponentLink2URL=http://industrial.panasonic.com/www-data/pdf/AOA0000/AOA0000CE2.pdf, Composition="Thick Film", Features=-, Height=0.55MM, Manufacturer Part Number=ERJ-3EKF33R0V, Number of Terminations=2, Packaging="Cut Tape (CT)", Resistance (Ohms)=33, Size / Dimension="0.063\" L x 0.031\" W (1.60mm x 0.80mm)", Sort Value=33, Substitution Notes="33 , ±1% , 0603 , AEC-Q200", Supplier 1=Digi-Key
R10: library part ERJ-3EKF10R0V, "RES 10 OHM 1/10W 1% 0603 SMD", Limiting Element Voltage=75, Manufacturer="Panasonic Electronic Components", Maximum Overload Voltage=150, Maximum Working Voltage=1.0V, Package="0603 (1608 Metric)", Package Power="0603  (0.1W)", Power (Watts)="0.1W- 1/10W", Ratings=AEC-Q200, Sort Value Package=603_10, Supplier Package=0603, Supplier Part Number 1=P10.0HCT-ND, Temperature Coefficient=±100ppm/°C, Tolerance=±1%, Category=Resistors, ComponentLink1Description="Internal Datasheet", ComponentLink1URL="datasheets\Panasonic Electronic Components\AOA0000CE2.pdf", ComponentLink2Description="External Datasheet", ComponentLink2URL=http://industrial.panasonic.com/www-data/pdf/AOA0000/AOA0000CE2.pdf, Composition="Thick Film", Features=-, Height=0.55MM, Manufacturer Part Number=ERJ-3EKF10R0V, Number of Terminations=2, Packaging="Cut Tape (CT)", Resistance (Ohms)=10, Size / Dimension="0.063\" L x 0.031\" W (1.60mm x 0.80mm)", Sort Value=10, Substitution Notes="10 , ±1% , 0603 , AEC-Q200", Supplier 1=Digi-Key
U1: "FLORA LI-PO BATTERY 3.7V 150MAH", Manufacturer="Adafruit Industries", Supplier Part Number 1=1528-1839-ND, ComponentLink1Description=http://www.mouser.com/ds/2/737/C1515_-_Li-Polymer_402025_150mAh_3.7V_with_PCM-932829.pdf?src-supplier=Mouser, ComponentLink1URL=http://www.mouser.com/ds/2/737/C1515_-_Li-Polymer_402025_150mAh_3.7V_with_PCM-932829.pdf?src-supplier=Mouser, ComponentLink2Description=https://cdn-shop.adafruit.com/product-files/1317/C1515_-_Li-Polymer_402025_150mAh_3.7V_with_PCM.pdf?src-supplier=Digi-Key, ComponentLink2URL=https://cdn-shop.adafruit.com/product-files/1317/C1515_-_Li-Polymer_402025_150mAh_3.7V_with_PCM.pdf?src-supplier=Digi-Key, Height=0.5inch, Length=2.5inch, Manufacturer Part Number=1317, Mount=Cable, Pricing 1="1=5.95000 (USD)", RoHS=No, Stock 1=333, Supplier 1=Digi-Key, Weight=0.01lb, Width=1.75inch
U2: "Charge Controller Li-Ion/Li-Pol 15mA to 500mA 4.2V 5-Pin SOT-23 T/R", Manufacturer=Microchip, Supplier Part Number 1=MCP73832T-2ATI/OTCT-ND, ComponentLink1Description=https://datasheet.ciiva.com/1137/630369-1137827.pdf?src-supplier=Element14, ComponentLink1URL=https://datasheet.ciiva.com/1137/630369-1137827.pdf?src-supplier=Element14, ComponentLink2Description=https://datasheet.ciiva.com/15115/getdatasheetpartid-574102-15115383.pdf?src-supplier=Verical, ComponentLink2URL=https://datasheet.ciiva.com/15115/getdatasheetpartid-574102-15115383.pdf?src-supplier=Verical, ComponentLink3Description=https://datasheet.ciiva.com/1932/21984e-1932955.pdf?src-supplier=Digi-Key, ComponentLink3URL=https://datasheet.ciiva.com/1932/21984e-1932955.pdf?src-supplier=Digi-Key, ComponentLink4Description=https://datasheet.ciiva.com/1932/21984e-1932956.pdf?src-supplier=Digi-Key, ComponentLink4URL=https://datasheet.ciiva.com/1932/21984e-1932956.pdf?src-supplier=Digi-Key, ComponentLink5Description=https://datasheet.ciiva.com/1932/21984e-1932957.pdf?src-supplier=Digi-Key, ComponentLink5URL=https://datasheet.ciiva.com/1932/21984e-1932957.pdf?src-supplier=Digi-Key, ComponentLink6Description=https://datasheet.ciiva.com/17299/21984e-17299342.pdf?src-supplier=Avnet+Europe, ComponentLink6URL=https://datasheet.ciiva.com/17299/21984e-17299342.pdf?src-supplier=Avnet+Europe, Manufacturer Part Number=MCP73832T-2ATI/OT, Pricing="1=0.56, 25=0.47, 100=0.42 (USD)", RoHS=Yes, Stock=3196, Supplier 1=Digi-Key
U3: "IC REG LINEAR 3.3V 300MA SOT23-5", Case/Package=SOT-23, Dropout Voltage=200mV, Input Bias Current=25uA, Manufacturer=Microchip, Max Input Voltage=10V, Max Operating Temperature=85°C, Max Output Current=300mA, Max Power Dissipation=250mW, Min Input Voltage=2V, Min Operating Temperature=-40°C, Min Output Voltage=3.3V, Output Voltage Accuracy=2%, Package Quantity=3000, Quiescent Current=50uA, Supplier Part Number 1=MCP1802T-3302I/OTCT-ND, Accuracy=2%, ComponentLink1Description=https://datasheet.ciiva.com/41458/001085944-da-01-en-ic-reg-ld-mcp1802t-3302i-ot-sot-23-5-mcp-41458834.pdf?src-supplier=Conrad, ComponentLink1URL=https://datasheet.ciiva.com/41458/001085944-da-01-en-ic-reg-ld-mcp1802t-3302i-ot-sot-23-5-mcp-41458834.pdf?src-supplier=Conrad, ComponentLink2Description=https://datasheet.ciiva.com/2040/22053c-2040531.pdf?src-supplier=Digi-Key, ComponentLink2URL=https://datasheet.ciiva.com/2040/22053c-2040531.pdf?src-supplier=Digi-Key, ComponentLink3Description=https://datasheet.ciiva.com/16454/filehandler-aspxddocname-en531342-16454309.pdf?src-supplier=Future+Electronics, ComponentLink3URL=https://datasheet.ciiva.com/16454/filehandler-aspxddocname-en531342-16454309.pdf?src-supplier=Future+Electronics, ComponentLink4Description=https://datasheet.ciiva.com/15200/getdatasheetpartid-626522-15200301.pdf?src-supplier=Verical, ComponentLink4URL=https://datasheet.ciiva.com/15200/getdatasheetpartid-626522-15200301.pdf?src-supplier=Verical, ComponentLink5Description=https://datasheet.ciiva.com/2040/22053c-2040529.pdf?src-supplier=Digi-Key, ComponentLink5URL=https://datasheet.ciiva.com/2040/22053c-2040529.pdf?src-supplier=Digi-Key, ComponentLink6Description=https://datasheet.ciiva.com/2040/22053c-2040530.pdf?src-supplier=Digi-Key, ComponentLink6URL=https://datasheet.ciiva.com/2040/22053c-2040530.pdf?src-supplier=Digi-Key, ComponentLink7Description=https://datasheet.ciiva.com/14562/70048283-14562246.pdf?src-supplier=Allied+Electronics, ComponentLink7URL=https://datasheet.ciiva.com/14562/70048283-14562246.pdf?src-supplier=Allied+Electronics, ComponentLink8Description=https://datasheet.ciiva.com/46395/808935-46395672.pdf?src-supplier=Element14, ComponentLink8URL=https://datasheet.ciiva.com/46395/808935-46395672.pdf?src-supplier=Element14, ComponentLink9Description=https://datasheet.ciiva.com/8239/jp531342-8239437.pdf?src-supplier=Avnet, ComponentLink9URL=https://datasheet.ciiva.com/8239/jp531342-8239437.pdf?src-supplier=Avnet, Height=0.051inch, Lead Free="Lead Free", Length=0.122inch, Manufacturer Part Number=MCP1802T-3302I/OT, Mount="Surface Mount", Nominal Output Voltage=3.3V, Number of Outputs=1, Number of Pins=5, Output Current=300mA, Output Type=Fixed, Output Voltage=3.3V, Packaging="Tape and Reel", Polarity=Positive, Power Dissipation=250mW, Pricing 1="1=0.53000, 25=0.44000, 100=0.40000 (USD)", Radiation Hardening=No, REACH SVHC="No SVHC", RoHS=Yes, Stock 1=3179, Supplier 1=Digi-Key, Width=0.071inch
U4: "TVS DIODE 5.5VWM SOT143B", Capacitance @ Frequency="1pF @ 1MHz", Current - Peak Pulse (10/1000µs)=-, Manufacturer="NXP Semiconductors", Operating Temperature="-40°C ~ 85°C (TA)", Package / Case="TO-253-4, TO-253AA", Power Line Protection=Yes, Supplier Device Package=SOT-143B, Supplier Part Number 1=568-4140-1-ND, Voltage - Breakdown (Min)=6V, Voltage - Reverse Standoff (Typ)="5.5V (Max)", Applications="General Purpose", Bidirectional Channels=2, Category="Circuit Protection", ComponentLink1Description=http://www.nxp.com/documents/data_sheet/PRTR5V0U2X.pdf, ComponentLink1URL=http://www.nxp.com/documents/data_sheet/PRTR5V0U2X.pdf, Manufacturer Part Number=PRTR5V0U2X,215, Mounting Type="Surface Mount", Packaging="Cut Tape (CT)", Power - Peak Pulse=-, Pricing="1=0.57, 10=0.477, 25=0.418, 100=0.3578, 250=0.31036, 500=0.26286, 1000=0.20265 (USD)", RoHS="RoHS Compliant", Stock=11734, Supplier 1=Digi-Key, Type="Steering (Rail to Rail)", Unidirectional Channels=-, Voltage - Clamping (Max) @ Ipp=-
U5: "IC MCU 100MHZ CORTEX M33 DUAL", Manufacturer="NXP Semiconductors", Supplier Part Number 1=771-LPC55S69JEV98K, Manufacturer Part Number=LPC55S69JEV98K, Pricing="1=6.94000, 10=6.27000, 25=5.98000, 100=5.19000, 250=4.96000, 500=4.52000 (USD)", RoHS=No, Stock=2365, Supplier 1=Mouser
U6: "20Hz ~ 10kHz Digital, I²S Microphone MEMS (Silicon) 1.8V Omnidirectional (-26dB ±3dB @ 94dB SPL) Solder Pads", Manufacturer="Knowles Acoustics", Operating Supply Current=600uA, Supplier Part Number 1=423-1405-1-ND, Voltage Rating=1.8V, ComponentLink1Description=http://www.knowles.com/eng/content/download/5988/105771/version/4/file/SPH0645LM4H-BRevB.PDF, ComponentLink1URL=http://www.knowles.com/eng/content/download/5988/105771/version/4/file/SPH0645LM4H-BRevB.PDF, ComponentLink2Description=https://media.digikey.com/pdf/Data%20Sheets/Knowles%20Acoustics%20PDFs/SPH0645LM4H-B.pdf, ComponentLink2URL=https://media.digikey.com/pdf/Data%20Sheets/Knowles%20Acoustics%20PDFs/SPH0645LM4H-B.pdf, Direction=Omnidirectional, Height=1.08mm, Length=3.5mm, Manufacturer Part Number=SPH0645LM4H-B, Output Type=Digital, Packaging="Tape and Reel", Pricing 1="1=2.97, 10=2.357, 25=2.1448, 50=2.0076, 100=1.8704, 250=1.70832, 500=1.58364, 1000=1.5587 (USD)", Shape=Rectangular, Stock 1=13538, Supplier 1=Digi-Key, Termination=Solder, Width=2.65mm
U7: "1.54\" 240x240 IPS Display", Manufacturer="Buy Display", Manufacturer Part Number=ER-TFT1.54-1
U9: "Crystal 16MHz ±20ppm (Tol) ±50ppm (Stability) 18pF FUND 50Ohm 2-Pin CSMD T/R", Case/Package=CSMD, ESR (Equivalent Series Resistance)=40R, Frequency Stability=50ppm, Frequency Tolerance=20ppm, Load Capacitance=18pF, Manufacturer=Abracon, Manufacturer Part Number=ABM3-16.000MHZ-B2-T, Max Operating Temperature=70°C, Min Operating Temperature=-20°C, Package Quantity=1000, Series Resistance=60R, Supplier Part Number 1=535-9103-1-ND, Accuracy=20ppm, Category=Crystals, ComponentLink1Description=https://datasheet.ciiva.com/15116/getdatasheetpartid-719852-15116752.pdf?src-supplier=Verical, ComponentLink1URL=https://datasheet.ciiva.com/15116/getdatasheetpartid-719852-15116752.pdf?src-supplier=Verical, ComponentLink2Description=https://datasheet.ciiva.com/4945/abm3-47699-4945240.pdf?src-supplier=Mouser, ComponentLink2URL=https://datasheet.ciiva.com/4945/abm3-47699-4945240.pdf?src-supplier=Mouser, ComponentLink3Description=https://datasheet.ciiva.com/855/abm3-855737.pdf?src-supplier=Digi-Key, ComponentLink3URL=https://datasheet.ciiva.com/855/abm3-855737.pdf?src-supplier=Digi-Key, ComponentLink4Description=https://datasheet.ciiva.com/855/abm3-855738.pdf?src-supplier=Digi-Key, ComponentLink4URL=https://datasheet.ciiva.com/855/abm3-855738.pdf?src-supplier=Digi-Key, ComponentLink5Description=https://datasheet.ciiva.com/855/abm3-855739.pdf?src-supplier=Digi-Key, ComponentLink5URL=https://datasheet.ciiva.com/855/abm3-855739.pdf?src-supplier=Digi-Key, ComponentLink6Description=https://datasheet.ciiva.com/16209/abm3-16209965.pdf?src-supplier=Future+Electronics, ComponentLink6URL=https://datasheet.ciiva.com/16209/abm3-16209965.pdf?src-supplier=Future+Electronics, Composition=Ceramic, Depth=3.2mm, Frequency=16MHz, Height=0.051inch, Lead Free="Lead Free", Length=5mm, Mount="Surface Mount", Number of Pins=2, Packaging="Tape and Reel", Pricing="1=0.66000, 10=0.55300, 50=0.49780, 100=0.44260, 500=0.42044 (USD)", REACH SVHC=Yes, RoHS=Yes, Stock=9690, Supplier 1=Digi-Key, Termination=SMD/SMT, Tolerance=20ppm, Width=3.2mm
U10: library part OPA340, Manufacturer="Texas Instruments", Manufacturer Part Number=OPA340NA/250, Source Part Number=OPA340NACT-ND, ROHS Certificate=ROHS-TI.pdf, Source=Digikey

## Free pads (board coordinates)
  rect 125x150 smd: 1(510,-1030) 2(511,-1265)
  round 60 hole 70: 2(-700,-1475) 2(-700,0) 2(700,-1475) 2(700,0)

## Via types
v1: diameter 18, hole 10, Top Layer to Bottom Layer, tented both sides, 105 vias
v2: diameter 18, hole 8, Top Layer to Bottom Layer, tented both sides, 4 vias
v3: diameter 40, hole 20, Top Layer to Bottom Layer, tented both sides, 1 vias

## Nets (pads, with @x,y where several pads share a name; then routed paths per layer and width w, separated by ;. In a path a pad name is that pad's centre, name@x,y a point inside that pad or via, vN(x,y) a via of type N, cw(c..) or ccw(c..) an arc to the next point about the centre after c; other vN are vias at no path point)
+3.3v: C1.2 C2.2 C3.2 C4.2 C5.2 C6.2 J3.1 J4.1 L3.1 L4.1 P10.1 P22.1 R5.2 R6.2 R9.1 U3.5 U5.A3 U5.A5 U5.A9 U5.A13 U5.M1 U5.M13 U5.N13 U6.5 U7.3 U7.4 U10.5 | length 6165.9
  Top Layer w5: J4.1 J4.1@-426.28,-456 ; R6.2 -293.03,-445.69 -286.67,-452.04 R6.2@-286.67,-454.01 ; v1@-272.81,-458.85 v1(-270.66,-461) v1@-268.17,-458.51 ; R5.2@-254.33,-453.01 -254.33,-451.04 -247.97,-444.69 R5.2 ; v1(-143,-530.56) -138.2,-535.36 C3.2 -118.11,-534.25 U5.N13 ; v1(-104,-200) -103.76,-200 -98.43,-205.33 U5.M1 ; U5.M13 -98.43,-509.94 -87.23,-521.13 -82.31,-521.13 -73,-530.44 C2.2 ; v1(-69,-154) -68.86,-154.14 C4.2 ; L4.1 50.34,-107.96 50.34,-99.66 78,-72 119,-72 130,-83 L3.1 ; U5.A13 147,-497 v1(158,-497) ; U5.A9 180.69,-389.37 190,-398.68 C5.2 190,-405.75 C5.2@199.31,-415.06 ; U5.A3 U5.A5 187.01,-310.63 C6.2 ; v1@156.7,-111.3 v1(158,-110) ; C1.2 C1.2@394.74,-540.71 ; v1(602,-700) 602.87,-699.13 U6.5
  Top Layer w12: P22.1 -500,-1257 -364,-1121 v1(-84,-1121) -55,-1121 -28,-1148 v1(169,-1148) ; J4.1@-426.28,-456 -413.45,-443.17 v1(-389,-443.17) ; J3.1 -354,-148 v1(-336,-130) ; R6.2@-286.67,-454.01 -281.84,-458.85 v1@-272.81,-458.85 ; v1@-268.17,-458.51 -259.83,-458.51 R5.2@-254.33,-453.01 ; C3.2 C2.2 -53.64,-535.36 -46,-543 v1(-46,-647) ; v1(95,-617) 96,-618 223,-618 ; L3.1 v1@156.7,-111.3 ; v1(158,-497) 223,-562 223,-618 ; C5.2@190,-398.68 190,-353.16 ; C6.2 190,-353.16 ; C5.2@199.31,-415.06 206.38,-415.06 225,-433.68 v1(225,-494) ; v1(222,-341) 209.84,-353.16 190,-353.16 ; v1(283,-829) 223,-769 223,-618 ; U10.5 347.4,-197.88 353.21,-192.07 358.13,-192.07 400,-150.2 P10.1 ; C1.2 394.45,-585.55 362,-618 223,-618 ; C1.2@394.74,-540.71 U3.5 ; v1(417,-731) 431.32,-731 R9.1
  Bottom Layer w5: v1@-385.99,-443.17 -379.15,-450 -367.29,-450 -356.29,-461 v1(-270.66,-461) ; v1(417,-731) 477,-731 500,-754 607,-754 622,-739 622,-717 v1@605.26,-700.26
  Bottom Layer w12: v1(-389,-443.17) v1@-385.99,-443.17 ; v1(-336,-130) -312,-154 v1(-69,-154) ; v1(-270.66,-461) -254.66,-445 -214.28,-445 -143,-516.28 v1(-143,-530.56) ; v1(-104,-200) -95,-200 -69,-174 v1(-69,-154) ; v1(-84,-1121) -83.15,-1120.15 U7.3 ; U7.4 -55.59,-1119.56 v1(-55,-1120.15) ; v1(-46,-647) -16,-617 v1(95,-617) ; v1(158,-497) 190,-497 ; v1(169,-1148) 283,-1034 v1(283,-829) ; v1(222,-341) 237,-326 237,-189 v1(158,-110) ; v1(225,-494) 222,-497 190,-497 ; v1(378,-173) 315,-110 v1(158,-110) ; v1(417,-731) 416,-731 319,-634 319,-577 307.5,-565.5 227.5,-565.5 190,-528 190,-497 ; v1(-69,-154) 114,-154 v1(158,-110)
+5v_In: D1.1 P11.1 | length 147.6
  Top Layer w20: D1.1 455.55,-116.36 459.33,-112.58 459.33,-99.79 500,-59.12 P11.1
+5v_USB: J1.1 L1.1 U4.4 | length 432.2
  Top Layer w10: v1(351.93,-486) 351.93,-478.93 346.58,-473.58 345.69,-473.58 338.87,-466.77 U4.4 338.87,-462.83 345.69,-456.02 347.65,-456.02 376,-427.68 376,-405 401.94,-379.06 429.52,-379.06 J1.1 ; v1(451,-681) 451,-700.83 L1.1
  Bottom Layer w10: v1(351.93,-486) 359,-486 364,-491 364,-591.84 451,-678.84 v1(451,-681)
ADC0_12: U5.C1 U10.1 U10.4 | length 373.2
  Top Layer w5: U5.C1 78.74,-210.35 97.02,-192.07 149.07,-192.07 173.4,-216.4 221.78,-216.4 235.37,-202.8 U10.4
  Top Layer w12: U10.4 272.6,-197.88 309.48,-161 335,-161 347.4,-148.6 U10.1
BATT_STAT: R9.2 U2.1 U5.B12 | length 719.4
  Top Layer w5: v1(60,-430) 80,-430 U5.B12 ; v1(391,-821) 442.31,-821 U2.1 453.4,-817.6 491.69,-779.31 R9.2
  Bottom Layer w5: v1(60,-430) 60,-460 v1(141,-541) 161,-561 161,-591 v1(391,-821)
BTN2: BTN2.2 U5.H13 | length 869.4
  Top Layer w5: v1@-19.69,-499.69 v1(-19.69,-496) U5.H13
  Bottom Layer w5: BTN2.2@-734.96,-791.93 -352.5,-791.93 -56.57,-496 v1(-19.69,-496)
BTN3: BTN3.2 U5.M8 | length 1319.3
  Top Layer w5: v1(-372,-877.72) v1(-372,-603) ; v1(-221.25,-480.75) -219.51,-482.49 -212.51,-482.49 -212,-483 -160,-483 -141.63,-464.63 -141.63,-416.76 -135.87,-411 -93,-411 -79,-397 -79,-380.18 -89.5,-369.69 U5.M8
  Bottom Layer w5: BTN3.2@-740,-1181.93 -734.43,-1187.5 -519.5,-1187.5 -372,-1040 v1(-372,-877.72) ; v1(-372,-603) -357.43,-603 -234.43,-480 -231.94,-482.49 -224.49,-482.49 -222.74,-480.75 v1(-221.25,-480.75)
DM: J1.2 R3.1 U4.3 | length 282
  Top Layer w5: U4.3 264,-462.83 292,-434.83 292,-360.53 328.05,-324.48 R3.1 358.48,-324.48 384.59,-350.59 J1.2
DP: J1.3 R4.1 U4.2 | length 249.6
  Top Layer w5: U4.2 264,-328.48 R4.1 269.95,-325.48 292.43,-303 357,-303 379,-325 J1.3
FC1_SCL: P12.1 U5.C13 | length 1181.6
  Top Layer w5: U5.C13 78.74,-609.93 78.5,-610.17 78.5,-623.83 78.74,-624.07 78.74,-689.74 421,-1032 421,-1330 500,-1409 P12.1
FC1_SDA: P13.1 U5.C12 | length 1171.9
  Top Layer w5: U5.C12 64,-463.17 64,-704 373,-1013 373,-1332 400,-1359 P13.1
GND: BTN1.1 BTN2.1 BTN3.1 C1.1 C2.1 C3.1 C4.1 C5.1 C6.1 C7.1 C8.1 C9.2 C10.1 C11.1 C12.1 J1.4 J1.5 J1.MOUNT J3.3 J3.5 J3.9 J4.5 P7.1 P16.1 pad.2@511,-1265 Q1.2 R2.1 R7.1 R8.1 RESET1.1 U2.2 U3.2 U4.1 U5.B1 U5.B5 U5.B9 U5.B13 U5.H1 U5.H2 U5.M11 U5.M12 U5.N1 U5.N5 U5.N12 U6.2 U6.3 U7.1 U7.5 U7.6 U7.12 U10.2 | length 3099.1
  Top Layer w5: v1(-681.04,-666) -589,-666 v1(-578,-655) ; Q1.2@-671.57,-1166.57 Q1.2 -598.35,-1172 v1(-581.35,-1155) ; J3.9@-589,-147 v1(-589,-101) ; v1(-532,-431) -529,-428 J4.5 ; J3.5 v1(-488,-98) ; J3.3 v1(-438,-95) ; C12.1 v1(-328,-258) C11.1 ; v1(-310.45,-588.45) C7.1 ; C8.1 v1(-162.69,-454.64) v1@-158.05,-450 ; v1(-147,-328.03) -129.6,-310.63 U5.N5 ; v1(-130,-184) -130,-220 U5.N1 ; U5.N12 U5.M12 U5.M11 -98.22,-428.74 -92.48,-423 v1(-71,-423) ; C3.1 C2.1 v1(-73,-607) ; v1(-70,-109) -69.87,-108.87 C4.1 ; U5.H2 U5.H1 -19.69,-204.69 v1(-19,-204) ; C10.1 2,-105.44 14.44,-93 v1(15.69,-93) ; v1(65,-392) 82.82,-392 85.45,-389.37 U5.B9 ; v1(79,-310.63) U5.B5 ; C9.2 88,-101.93 97.31,-92.62 104.38,-92.62 v1(107.19,-89.81) ; U5.B13 98.43,-540.08 v1(100,-541.66) ; U5.B1 98.43,-214 v1(99,-213.43) ; v1(170,-263) 170.64,-262.36 C6.1 ; v1(187,-199.9) 207.98,-199.9 R7.1 ; C5.1 193.94,-451.58 193.94,-468.94 v1(198,-473) ; v1(283.33,-543) 285.33,-541 C1.1 ; v1(309,-88) 310,-89 U10.2 ; U4.1 343,-378 v1(362,-378) ; v1(379,-292) 386.41,-299.41 J1.4 ; v1(381,-262) 392.82,-273.82 J1.5 ; U2.2 v1(473,-855) ; v1(509,-1182) 509,-1263 pad.2@511,-1265 ; U3.2 520,-654 v1(521,-655) ; v1(535.58,-784.42) R2.1 ; v1(580,-904) R8.1 ; v1(592,-801) 594,-799 679,-799 689,-789 U6.2 693.63,-765.37 693.63,-753.62 709.41,-737.84
  Top Layer w12: RESET1.1 v1(-760,-336) ; v1(-622,-242.26) -589,-242.26 J3.9@-589,-147
  Top Layer w50: P16.1 v3(100,-1366)
  Bottom Layer w5: BTN3.1 -593.63,-1052.63 -576.5,-1035.5 v2(-576.5,-1019) ; BTN2.1 -683.97,-663.07 v1(-681.04,-666) ; v1(-139,-1101) -138.27,-1100.27 U7.1 ; v1@-28.03,-941.03 U7.5 -28.03,-1104.97 v1(-27,-1106) ; v1(-0.47,-943.26) U7.6 -0.47,-1104.53 v1(0,-1105) ; v1(65,-392) v1@65,-391.5 ; U7.12 164.88,-1099.88 v1(166,-1101) ; v1(535.58,-784.42) 554.17,-803 583,-803
  Bottom Layer w12: v1@-759.04,-336.26 -760,-335.3 BTN1.1 -742.28,-271.33 -732.54,-261.58 -732.54,-258.75 -716.04,-242.26 v1(-622,-242.26) ; v1@100,-87 102.81,-89.81 v1(107.19,-89.81)
  Bottom Layer w50: v1@100,-87 P7.1
  other v1: -28,-941
ISP0: BTN1.2 R6.1 U5.A7 | length 1064.9
  Top Layer w5: R6.1 -289.51,-411.8 -280.2,-411.8 v1(-273,-419) ; U5.A7 151,-350 v1(158,-343)
  Bottom Layer w5: BTN1.2@-734.96,-401.93 -658,-401.93 -648.43,-411.5 -502.75,-411.5 -487.58,-426.67 -382.17,-426.67 -370.33,-438.5 -315.36,-438.5 -295.86,-419 -275.15,-419 -142.15,-286 -47,-286 -14.94,-318.06 44.8,-318.06 62.09,-335.35 150.35,-335.35 v1(158,-343)
LCD_BL: Q1.1 U5.F12 | length 1433.8
  Top Layer w5: Q1.1@-758,-1182 -724,-1216 -585,-1216 -562,-1193 v1(-562,-1085) ; U5.F12 19.69,-435.41 26,-429.1 v1(26,-426)
  Bottom Layer w5: v1(-562,-1085) -560,-1085 -550,-1075 -550,-965 -427,-842 -336.49,-842 -50.49,-556 -6.47,-556 7.46,-542.06 7.46,-474.63 -21,-446.17 -21,-410.67 -3.83,-393.5 13.36,-393.5 26,-406.14 v1(26,-426)
LCD_CMD_DATA: P21.1 U5.G13 U7.7 | length 1352.5
  Top Layer w5: U5.G13 0,-802 v1(26,-828)
  Bottom Layer w5: P21.1 -400,-1295 -340,-1235 -71.11,-1235 27.09,-1136.8 U7.7 26,-1025.8 v1(26,-828)
LCD_RST: P17.1 U5.F13 U7.11 | length 1114.7
  Top Layer w5: U5.F13 19.69,-762.69 140,-883 v1(140,-922)
  Bottom Layer w5: P17.1 0,-1356 137.32,-1218.68 U7.11 137.32,-931.43 137.51,-931.24 137.51,-924.49 v1(140,-922)
LCD_SPI_CS: P20.1 U5.G11 U7.8 | length 1422.8
  Top Layer w5: U5.G11 0,-413 v1(3,-410) ; v2(122.5,-648) 122.5,-706.73 v2(122.77,-707)
  Bottom Layer w5: P20.1 -300,-1339 -232,-1271 -39,-1271 54.65,-1177.35 U7.8 54.65,-902.52 122.77,-834.39 v2(122.77,-707) ; v1(3,-410) 3.17,-410.17 3.17,-440.08 58.17,-495.08 58.17,-532.17 122.5,-596.5 v2(122.5,-648)
LCD_SPI_MOSI: P18.1 U5.H12 U7.10 | length 1290.7
  Top Layer w5: U5.H12 -34.35,-433.76 -43.79,-433.76 -54,-443.96 -54,-490 -15,-529 -15,-827 57,-899 v1(88,-899)
  Bottom Layer w5: P18.1 -100,-1360 -50,-1310 22,-1310 109.76,-1222.24 U7.10 109.76,-920.76 v1(88,-899)
LCD_SPI_SCK: P19.1 U5.G12 U7.9 | length 1377.3
  Top Layer w5: U5.G12 -24.67,-423.76 -47.93,-423.76 -64,-439.82 -64,-495 -25,-534 -25,-834 v1(79,-938)
  Bottom Layer w5: P19.1 -200,-1355 -138,-1293 5,-1293 82.2,-1215.8 U7.9 82.2,-941.2 v1(79,-938)
MIC_BCLK: U5.B7 U6.4 | length 859.8
  Top Layer w5: v1(59,-365) 83.43,-365 U5.B7 ; v1(595,-672) 680,-672 689,-681 U6.4
  Bottom Layer w5: v1(59,-365) 304,-365 383,-444 427,-444 584.22,-601.22 584.22,-641.22 595,-652 v1(595,-672)
MIC_DATA: U5.F8 U6.6 | length 857.6
  Top Layer w5: v1(14,-355) 14,-363.74 19.69,-369.43 U5.F8 ; v1(604,-730) 607.52,-730 612.08,-734.57 U6.6
  Bottom Layer w5: v1(14,-355) 14,-375 51,-412 116,-412 129,-399 201,-399 271.21,-469.21 377.21,-469.21 565,-657 565,-702 595,-732
MIC_WS: U5.B11 U6.1 | length 760.3
  Top Layer w5: U5.B11 99.58,-427.59 99.58,-421.18 105.76,-415 126.08,-415 170.69,-459.6 170.69,-480.69 277,-587 v1(288.67,-587) ; v1(606,-775) 609.52,-775 614.52,-770 U6.1
  Bottom Layer w5: v1(288.67,-587) 288.67,-650.67 405.92,-767.92 587.92,-767.92 597,-777
NetC7_2: C7.2 C8.2 L2.1 U5.M9 U5.N9 | length 373.6